# Altium PCB CTA2045v1.PcbDoc
Units mil, origin at the board's own origin, x right, y up, seen from the top; angles counter-clockwise.
Board outline 3700.79 x 1574.8 mil, 2 copper layers (Top Layer, Bottom Layer); 15 components, 25 nets, 90 pads, 185 vias.
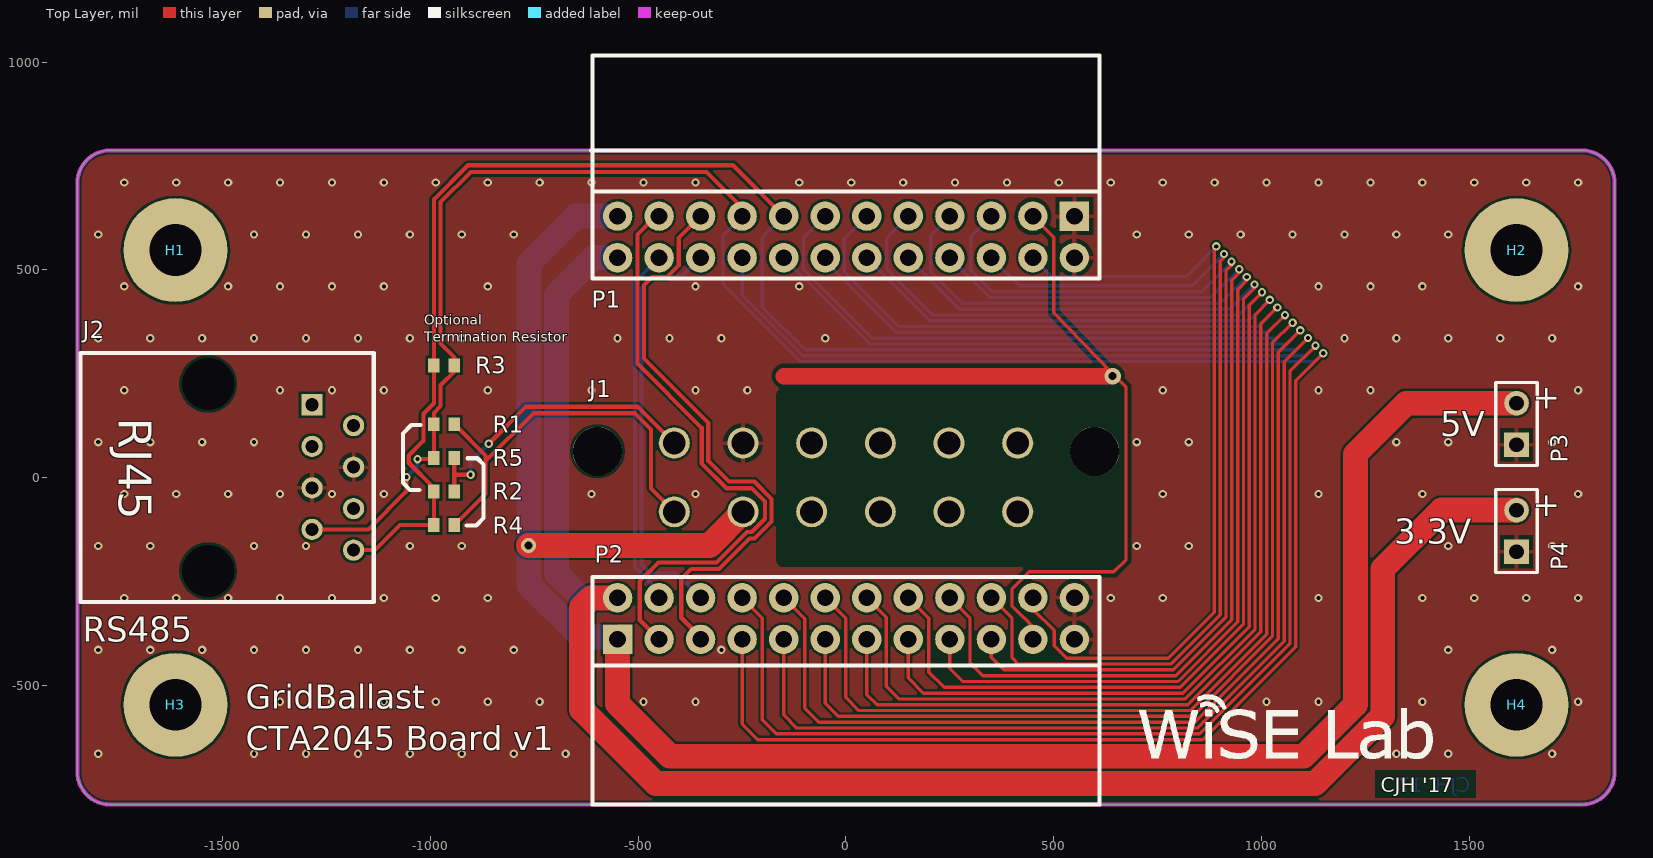
[diagram p0: Top Layer view]
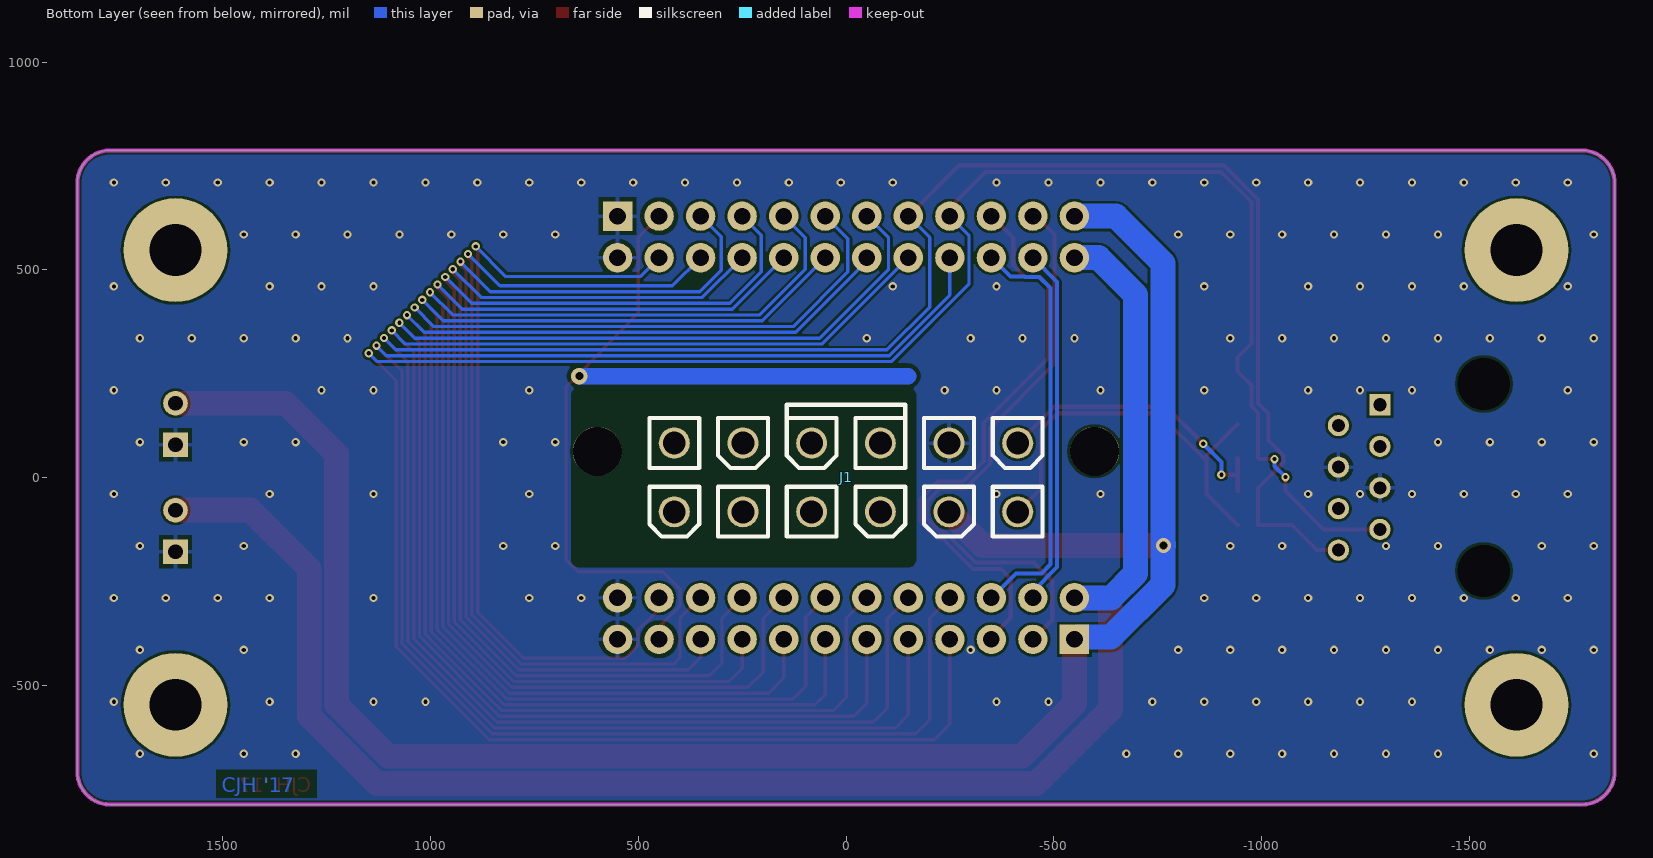
[diagram p1: Bottom Layer view, seen from below]

## Layer stack, top to bottom
Top Solder: solder mask 0.4, Solder Resist, Dk 3.5
Top Layer: signal copper 1.4
Dielectric 1: dielectric 12.6, FR-4, Dk 4.8
Bottom Layer: signal copper 1.4
Bottom Solder: solder mask 0.4, Solder Resist, Dk 3.5

## Board outline
-1771.65,787.4 1771.65,787.4 cw(c1771.65,708.66) 1850.39,708.66 1850.39,-708.66 cw(c1771.65,-708.66) 1771.65,-787.4 -1771.65,-787.4 cw(c-1771.65,-708.66) -1850.39,-708.66 -1850.39,708.66 cw(c-1771.65,708.66)

## Design rules (kind name [scope] priority, off if disabled: settings)
BoardOutlineClearance "BoardOutlineClearance - RJ45" [HasFootprint('RJ45 Unshielded PTH Connector')] p1: gap=0 ignorepadtopadclearanceinfootprint=FALSE
BoardOutlineClearance "BoardOutlineClearance - 4.2mm Pitch" [HasFootprint('2POS 4.2MM PITCH RIGHT ANGLE')] p2: gap=0 ignorepadtopadclearanceinfootprint=FALSE
BoardOutlineClearance "BoardOutlineClearance - Right Angle 0.1inch" [HasFootprint('0.1 INCH 2 ROW 24 POS FEMALE RIGHT-ANGLE HEADER SULLINS') or HasFootprint('0.1 inch 2 row 24 pos male right-angle header Sullins')] p3: gap=0 ignorepadtopadclearanceinfootprint=FALSE
BoardOutlineClearance "BoardOutlineClearance - MicroUSB" [HasFootprint('MicroUSB_TypeB')] p4: gap=0 ignorepadtopadclearanceinfootprint=FALSE
BoardOutlineClearance "BoardOutlineClearance - ESP32" [HasFootprint('ESP-WROOM-32')] p5: gap=0 ignorepadtopadclearanceinfootprint=FALSE
BoardOutlineClearance [All] p6: gap=10 ignorepadtopadclearanceinfootprint=FALSE
Clearance "Clearance - 60HzAnt" [InNet('60HzAnt')] p1: gap=10 ignorepadtopadclearanceinfootprint=FALSE
Clearance "Clearance - Keepout Ignore" [All vs IsKeepOut] p2: gap=0 ignorepadtopadclearanceinfootprint=FALSE
Clearance "Clearance - Antenna" [InNetClass('RF50')] p3: gap=12 ignorepadtopadclearanceinfootprint=FALSE
Clearance [All] p4: gap=6 ignorepadtopadclearanceinfootprint=FALSE
ComponentClearance "Ignore Enclosure Part" [InComponent('H1')] p1: gap=0 collisioncheckmode=3 verticalgap=0 showdistances=FALSE
DiffPairsRouting [All] p1: maxlimit=10 minlimit=6 mostfreqgap=10 toplayer_minwidth=6 toplayer_maxwidth=15 toplayer_prefwidth=10 bottomlayer_minwidth=6 bottomlayer_maxwidth=15 bottomlayer_prefwidth=10 maxuncoupledlength=500
HoleSize [All] p1: absolutevalues=TRUE maxlimit=500 minlimit=8 maxpercent=80.000 minpercent=20.000
MinimumSolderMaskSliver "MinimumSolderMaskSliver - Jumpers3" [HasFootprint('PAD-JUMPER-3-2OF3_NC_BY_TRACE_YES_SILK_FULL_BOX') vs HasFootprint('PAD-JUMPER-3-2OF3_NC_BY_TRACE_YES_SILK_FULL_BOX')] p1: minsoldermaskwidth=0
MinimumSolderMaskSliver "MinimumSolderMaskSliver - Jumpers2" [HasFootprint('PAD-JUMPER-2-NO_NO_SILK') vs HasFootprint('PAD-JUMPER-2-NO_NO_SILK')] p2: minsoldermaskwidth=0
MinimumSolderMaskSliver "MinimumSolderMaskSliver - Jumpers1" [HasFootprint('PAD-JUMPER-2-NC_BY_TRACE_NO_SILK') vs HasFootprint('PAD-JUMPER-2-NC_BY_TRACE_NO_SILK')] p3: minsoldermaskwidth=0
MinimumSolderMaskSliver "MinimumSolderMaskSliver - FTDI" [HasFootprint('PQFN5X5-32_V_FTDI_BIG_VIAS_LEADS') vs HasFootprint('PQFN5X5-32_V_FTDI_BIG_VIAS_LEADS')] p4: minsoldermaskwidth=0
MinimumSolderMaskSliver [All] p5: minsoldermaskwidth=4
NetAntennae [Not InNet('60HzAnt')] p1: netantennaetolerance=0
PolygonConnect "PolygonConnect - ViaStitching" [IsStitchingVia] p1: connectstyle=Direct reliefconductorwidth=10 reliefentries=4 polygonreliefangle="90 Angle" airgapwidth=10
PolygonConnect [All] p2: connectstyle=Relief reliefconductorwidth=10 reliefentries=4 polygonreliefangle="90 Angle" airgapwidth=10
RoomDefinition Main [InComponentClass('Main')] p1: confinementstyle=ConfineIn formatcopy=TRUE lockcomponents=FALSE outline -1860,-805 1755,-805 1755,1035 -1860,1035
RoutingVias [All] p1: holewidth=10 width=20 viastyle="Through Hole" minholewidth=8 minwidth=16 maxholewidth=50 maxwidth=100
ShortCircuit "ShortCircuit - FTDI" [HasFootprint('PQFN5X5-32_V_FTDI_BIG_VIAS_LEADS') and IsPad vs HasFootprint('PQFN5X5-32_V_FTDI_BIG_VIAS_LEADS') and (IsPolygon or IsRegion)] p1: allowed=TRUE
ShortCircuit ExemptJumpers [HasFootprint('PAD-JUMPER-2-NC_BY_TRACE_NO_SILK') or HasFootprint('PAD-JUMPER-3-2OF3_NC_BY_TRACE_YES_SILK_FULL_BOX')] p2: allowed=TRUE
ShortCircuit [All] p3: allowed=FALSE
SilkToSilkClearance [All] p1: silktosilkclearance=5
SilkToSolderMaskClearance [IsPad] p1: minsilkscreentomaskgap=0 clearancetoexposedcopper=TRUE
SolderMaskExpansion [All] p1: expansion=2
Width "Width - Antenna" [InNetClass('RF50')] p1: maxlimit=10000 minlimit=6 preferedwidth=10 impedancedriven=TRUE minimp=50.000000 maximp=50.000000 favimp=50.000000
Width [All] p2: maxlimit=10000 minlimit=6 preferedwidth=10 minimp=50.000000 maximp=50.000000 favimp=50.000000
22 further rules are at their usual default settings.

## Components (designator, comment, footprint, x,y, rotation, side; value= is the part's Value field where it differs from the comment)
H1 "1/8in Hole by 1/4in Ring Fastener" "1/8in Fastener Hole" -1614.17,547.24 r0 top locked
H2 "1/8in Hole by 1/4in Ring Fastener" "1/8in Fastener Hole" 1614.17,547.24 r0 top locked
H3 "1/8in Hole by 1/4in Ring Fastener" "1/8in Fastener Hole" -1614.17,-547.24 r0 top locked
H4 "1/8in Hole by 1/4in Ring Fastener" "1/8in Fastener Hole" 1614.17,-547.24 r0 top locked
J1 "TE 1-1586586-2" "12POS 4.2mm Pitch Vertical" 0,0 r0 bottom locked
J2 "RS485" "RJ45 Unshielded PTH Connector" -1535.43,0 r270 top locked
P1 "0.1\" Pitch, 2 Row, 24 Pos, Male Right-Angle" "0.1 inch 2 row 24 pos male right-angle header Sullins" 0,579.13 r180 top locked
P2 "0.1\" Pitch, 2 Row, 24 Pos, Female, Right-Angle" "0.1 inch 2 row 24 pos female right-angle header Sullins" 0,-339.76 r0 top locked
P3 "5V" HDR1X2 1614.17,78.74 r90 top locked
P4 "3.3V" HDR1X2 1614.17,-178.74 r90 top locked
R1 "0" "RESC1608X06L - RES0603" -967.58,128 r0 top
R2 "0" "RESC1608X06L - RES0603" -967.58,-33.86 r0 top
R3 "120" "RESC1608X06L - RES0603" -967.58,270 r180 top
R4 "0" "RESC1608X06L - RES0603" -967.58,-114.79 r0 top
R5 "0" "RESC1608X06L - RES0603" -967.58,47.07 r0 top

## Footprints (in the part's own frame and the unit in brackets; to place one, negate y for a bottom-side part, rotate by r counter-clockwise, add the part's x,y. Pads: shape width x height; smd on the part's side, far side on the other; paste and mask are expansions set on the pad)
"0.1 inch 2 row 24 pos female right-angle header Sullins" [mm] "Sullins 0.1\" Dual row 24 position female right-angle header"
  rect 1.8x1.8 hole 1.02: 1(-13.97,-1.27)
  round 1.8 hole 1.02: 2(-13.97,1.27) 3(-11.43,-1.27) 4(-11.43,1.27) 5(-8.89,-1.27) 6(-8.89,1.27) 7(-6.35,-1.27) 8(-6.35,1.27) 9(-3.81,-1.27) 10(-3.81,1.27) 11(-1.27,-1.27) 12(-1.27,1.27) 13(1.27,-1.27) 14(1.27,1.27) 15(3.81,-1.27) 16(3.81,1.27) 17(6.35,-1.27) 18(6.35,1.27) 19(8.89,-1.27) 20(8.89,1.27) 21(11.43,-1.27) 22(11.43,1.27) 23(13.97,-1.27) 24(13.97,1.27)
  silkscreen extent -15.5,-11.37 15.5,2.54, body extent -15.49,-11.34 15.49,1.5, height 5.08
"0.1 inch 2 row 24 pos male right-angle header Sullins" [mm] "Sullins 0.1\" Dual row 24 position male right-angle header"
  rect 1.8x1.8 hole 1.02: 1(-13.97,-1.27)
  round 1.8 hole 1.02: 2(-13.97,1.27) 3(-11.43,-1.27) 4(-11.43,1.27) 5(-8.89,-1.27) 6(-8.89,1.27) 7(-6.35,-1.27) 8(-6.35,1.27) 9(-3.81,-1.27) 10(-3.81,1.27) 11(-1.27,-1.27) 12(-1.27,1.27) 13(1.27,-1.27) 14(1.27,1.27) 15(3.81,-1.27) 16(3.81,1.27) 17(6.35,-1.27) 18(6.35,1.27) 19(8.89,-1.27) 20(8.89,1.27) 21(11.43,-1.27) 22(11.43,1.27) 23(13.97,-1.27) 24(13.97,1.27)
  silkscreen extent -15.5,-11.1 15.6,2.54, body extent -15.24,-11.12 15.24,1.6, height 5.04
"1/8in Fastener Hole" [mil]
  round 250 hole 125: 1(0,0)
"12POS 4.2mm Pitch Vertical" [mm] "TE Connectivity 1-1586586-2"
  round 3 hole 3 unplated: 0(-15.2,-1.6) 0(15.2,-1.6)
  round 1.9 hole 1.4: 1(-10.5,2.1) 2(-6.3,2.1) 3(-2.1,2.1) 4(2.1,2.1) 5(6.3,2.1) 6(10.5,2.1) 7(-10.5,-2.1) 8(-6.3,-2.1) 9(-2.1,-2.1) 10(2.1,-2.1) 11(6.3,-2.1) 12(10.5,-2.1)
  silkscreen extent -12.02,-4.44 12.02,3.62
HDR1X2 [mm] "Connector; Header; 2 Position"
  rect 1.5x1.5 hole 0.9: 1(0,0)
  round 1.5 hole 0.9: 2(2.54,0)
  silkscreen extent -1.27,-1.27 3.81,1.27
"RESC1608X06L - RES0603" [mm] "Chip Resistor, 2-Leads, Body 1.60x0.80mm, IPC High Density"
  rect 0.7x0.85 smd: 1(-0.625,0) 2(0.625,0)
  body extent -0.87,-0.48 0.87,0.48, height 0.55
"RJ45 Unshielded PTH Connector" [mm] "Amphenol 54601-908WPLF Unshielded RJ45 PTH Connector"
  round 0 hole 3.2 unplated: 0(-5.716,0) 0(5.716,0)
  rect 1.3x1.3 hole 0.8: 1(-4.444,6.35)
  round 1.3 hole 0.8: 2(-3.174,8.89) 3(-1.904,6.35) 4(-0.634,8.89) 5(0.636,6.35) 6(1.906,8.89) 7(3.176,6.35) 8(4.446,8.89)
  silkscreen extent -7.62,-7.8 7.62,10.12, body extent -7.62,-7.8 7.62,10.2, height 11.5

## Part data
H1 H2 H3 H4: library part "1/8in by 1/4in Fastner Hole"
J1: library part "12POS 4.2mm Pitch Vertical", "TE Connectivity 1-1586586-2", Supplier Part Number 1=70041598, Supplier 1=Allied, Supplier 2=Digi-Key, Supplier Part Number 2=1-1586586-2-ND
J2: library part "RJ45 Unshielded PTH Connector", "Amphenol RJ45 Unshielded Through-Hole Connector", Colour=Black, Contact Resistance=30mR, Current Rating=1A, Flammability Rating="UL94 V-0", Insulation Resistance=500MR, Manufacturer="Amphenol FCI", Manufacturer Part Number=54601-908WPLF, Max Operating Temperature=125°C, Min Operating Temperature=-65°C, Package Quantity=200, Supplier Part Number 1=609-5081-ND, Voltage Rating=1kV, ComponentLink1Description=https://datasheet.ciiva.com/9396/c-bmj-0051-9396388.pdf, ComponentLink1URL=https://datasheet.ciiva.com/9396/c-bmj-0051-9396388.pdf, ComponentLink2Description=https://datasheet.ciiva.com/26824/getdatasheetpartid-465238-26824373.pdf, ComponentLink2URL=https://datasheet.ciiva.com/26824/getdatasheetpartid-465238-26824373.pdf, ComponentLink3Description=https://datasheet.ciiva.com/1108/c-bmj-0051-1108424.pdf, ComponentLink3URL=https://datasheet.ciiva.com/1108/c-bmj-0051-1108424.pdf, ComponentLink4Description=https://datasheet.ciiva.com/15058/c-bmj-0051-15058750.pdf, ComponentLink4URL=https://datasheet.ciiva.com/15058/c-bmj-0051-15058750.pdf, ComponentLink5Description=https://datasheet.ciiva.com/16650/c-bmj-0051-16650286.pdf, ComponentLink5URL=https://datasheet.ciiva.com/16650/c-bmj-0051-16650286.pdf, ComponentLink6Description=https://datasheet.ciiva.com/7629/c-bmj-0051-7629183.pdf, ComponentLink6URL=https://datasheet.ciiva.com/7629/c-bmj-0051-7629183.pdf, Connector Type=RJ45, Contact Material=Bronze,Copper, Contact Plating=Nickel,Gold, Depth=18mm, Direction=Down, Gender=Male, Housing Colour=Black, Housing Material=Polyamide, Lead Free="Lead Free", Length=15.24mm, Mount="Through Hole", Number of Contacts=8, Number of Ports=1, Number of Positions=8, Number of Positions Loaded=8, Number of Rows=1, Orientation="Right Angle", Packaging=Rail/Tube, Pitch=2.54mm, Pricing 2="1=0.51, 10=0.377, 50=0.377, 100=0.362, 1000=0.26, 10000=0.212 (USD)", Radiation Hardening=No, REACH SVHC="No SVHC", Shielding=Unshielded, Stock 2=0, Supplier 1=Digi-Key, Supplier 2=Mouser, Supplier Part Number 2=649-54601-908WPLF, Termination="Through Hole"
P1: library part "0.1\" 2 row 24 position male right-angle header sullins", "Sullins 0.1\" 2 row 24 position male right-angle header", Supplier Part Number 1=S2112EC-12-ND, Gender=Male, Pitch=2.54mm, Positions=24, Rows=2, Supplier 1=Digi-Key
P2: library part "0.1\" 2 row 24 position female right-angle header sullins", "Sullins 0.1\" 2 row 24 position female right-angle header", Supplier Part Number 1=S5526-ND, Pitch=2.54mm, Positions=24, Rows=2, Supplier 1=Digi-Key, Supplier 2=Digi-Key, Supplier Part Number 2=S5565-ND
P3 P4: library part "Header 2", "Header, 2-Pin", LatestRevisionDate=17-Jul-2002, LatestRevisionNote="Re-released for DXP Platform.", Publisher="Altium Limited"
R1 R2 R4 R5: library part "RES0603 0 Jumper 1/10W", "SMT 0603 Ceramic Resistor", Power=1/10W, Supplier Part Number 1=311-0.0GRCT-ND, Tolerance=Jumper, Supplier 1=Digi-Key, Supplier 2=Digi-Key, Supplier Part Number 2=P0.0GCT-ND
R3: library part "RES0603 120 1% 1/10W", "SMT 0603 Ceramic Resistor", Supplier Part Number 1=311-120HRCT-ND, Supplier 1=Digi-Key, Supplier 2=Digi-Key, Supplier 3=Digi-Key, Supplier Part Number 2=RMCF0603FT120RCT-ND, Supplier Part Number 3=YAG3563CT-ND

## Via types
v1: diameter 20, hole 10, Top Layer to Bottom Layer, tented both sides, 183 vias
v2: diameter 36, hole 20, Top Layer to Bottom Layer, tented both sides, 1 vias
v3: diameter 40, hole 20, Top Layer to Bottom Layer, 1 vias

## Nets (pads, with @x,y where several pads share a name; then routed paths per layer and width w, separated by ;. In a path a pad name is that pad's centre, name@x,y a point inside that pad or via, vN(x,y) a via of type N, cw(c..) or ccw(c..) an arc to the next point about the centre after c; other vN are vias at no path point)
3.3V: P1.24 P2.2 P4.2 | length 4173
  Top Layer w60: P2.2 -613.57,-289.76 -636.52,-312.71 -636.52,-558.2 -457.52,-737.2 1129.23,-737.2 1292.08,-574.35 1292.08,-219.94 1433.28,-78.74 P4.2
  Bottom Layer w60: P2.2 -638.57,-289.76 -696.97,-231.36 -696.97,439.75 -607.59,529.13 P1.24
5V: J1.2 P1.23 P2.1 P3.2 | length 4927.9
  Top Layer w60: v2(-764.12,-163.57) -328.92,-163.57 J1.2 ; P2.1 -550,-544.58 -423.39,-671.2 1101.89,-671.2 1226.08,-547.01 1226.08,55.94 1348.88,178.74 P3.2
  Bottom Layer w60: v2(-764.12,-163.57) v2@-764.12,-159.52 ; v2@-762.97,-163.57 -762.97,-258.7 -637.37,-384.31 -555.46,-384.31 P2.1 ; v2@-762.97,-159.52 -762.97,515.69 -649.53,629.13 P1.23
60HzAnt: P1.3 P2.21 | length 1380.6
  Top Layer w8: P2.21 450,-359.15 430.04,-339.2 429.52,-339.2 399.59,-309.27 399.59,-268.83 441.29,-227.14 644.57,-227.14 674.14,-197.57 674.14,217.01 v3@647.05,244.09 ; P1.3 500.39,578.75 500.39,396.77 638.6,252.89 644.5,246.75 v3@647.05,244.09 ; 548.63,237.65 548.91,237.93 ; v3(641.73,244.09) v3@647.05,244.09 ; v3@654.62,236.22 648.43,242.66 v3@647.05,244.09
CT_N: P1.19 P2.5 | length 1414.8
  Top Layer w10: P2.5 -350,-384.28 -396.64,-337.64 -396.64,-244.51 -372.7,-220.57 -305.31,-220.57 -231.87,-147.13 -220.27,-147.13 -179.19,-106.05 -179.19,-51.62 -220.96,-9.85 -281.69,-9.85 -331.44,39.9 -331.44,131.27 -486.2,286.03 -486.2,463.22 -466.72,482.7 -430.77,482.7 -402.79,510.68 -402.79,576.35 P1.19
CT_P: P1.21 P2.3 | length 1440.8
  Top Layer w10: P2.3 -496.43,-343.33 -496.43,-249.14 -451.86,-204.57 -311.94,-204.57 -238.5,-131.13 -226.89,-131.13 -195.19,-99.43 -195.19,-58.24 -227.58,-25.85 -288.32,-25.85 -347.44,33.27 -347.44,119.51 -502.2,274.27 -502.2,585.06 -458.12,629.13 P1.21
GND: J1.8 J2.4 J2.5 P1.1 P1.2 P2.23 P2.24 P3.1 P4.1
  other v1: -1800,-665 -1425,-665 -1300,-665 -1175,-665 -1050,-665 -925,-665 -800,-665 -675,-665 1325,-665 1450,-665 1700,-665 -1362.5,-540 -1237.5,-540 -1112.5,-540 -987.5,-540 -862.5,-540 -737.5,-540 -487.5,-540 -362.5,-540 1012.5,-540 1137.5,-540 1387.5,-540 1762.5,-540 -1800,-415 -1675,-415 -1550,-415 -1425,-415 -1300,-415 -1175,-415 -1050,-415 -925,-415 -800,-415 -300,-415 1450,-415 1700,-415 -1737.5,-290 -1612.5,-290 -1487.5,-290 -1362.5,-290 -1237.5,-290 -1112.5,-290 -987.5,-290 -862.5,-290 637.5,-290 762.5,-290 1137.5,-290 1387.5,-290 1512.5,-290 1637.5,-290 1762.5,-290 -1800,-165 -1675,-165 -1425,-165 -1300,-165 -1050,-165 -925,-165 700,-165 825,-165 1450,-165 1700,-165 -1737.5,-40 -1612.5,-40 -1487.5,-40 -1362.5,-40 -1237.5,-40 -1112.5,-40 -612.5,-40 -362.5,-40 762.5,-40 1137.5,-40 1387.5,-40 1762.5,-40 -1800,85 -1675,85 -1550,85 -1425,85 700,85 825,85 1325,85 1450,85 1700,85 -1737.5,210 -1362.5,210 -1237.5,210 -1112.5,210 -862.5,210 -612.5,210 -362.5,210 -237.5,210 762.5,210 1137.5,210 1262.5,210 1762.5,210 -1800,335 -1675,335 -1550,335 -1425,335 -1300,335 -1175,335 -1050,335 -925,335 -550,335 -425,335 -300,335 -50,335 1200,335 1325,335 1450,335 1575,335 1700,335 -1737.5,460 -1487.5,460 -1362.5,460 -1237.5,460 -1112.5,460 -862.5,460 -362.5,460 -112.5,460 1137.5,460 1262.5,460 1387.5,460 1762.5,460 -1800,585 -1425,585 -1300,585 -1175,585 -1050,585 -925,585 -800,585 700,585 825,585 950,585 1075,585 1200,585 1325,585 1450,585 -1737.5,710 -1612.5,710 -1487.5,710 -1362.5,710 -1237.5,710 -1112.5,710 -987.5,710 -862.5,710 -737.5,710 -612.5,710 -487.5,710 -362.5,710 -112.5,710 12.5,710 137.5,710 262.5,710 387.5,710 512.5,710 637.5,710 762.5,710 887.5,710 1012.5,710 1137.5,710 1262.5,710 1387.5,710 1512.5,710 1637.5,710 1762.5,710
GPIO1: P1.18 P2.8 | length 3971.6
  Top Layer w8: P2.8 -201.31,-338.46 -201.31,-583.69 -167.8,-617.2 851.62,-617.2 1068.73,-400.08 1068.73,255.62 v1(1130.38,317.27)
  Bottom Layer w8: P1.18 -250,439.13 -104.14,293.26 1106.38,293.26 v1(1130.38,317.27)
GPIO2: P1.16 P2.10 | length 3631.3
  Top Layer w8: P2.10 -99.26,-340.5 -99.26,-555.09 -65.15,-589.2 840.02,-589.2 1040.73,-388.48 1040.73,301.16 v1(1093.61,354.04)
  Bottom Layer w8: P1.16 57.87,321.26 1060.84,321.26 v1(1093.61,354.04)
GPIO3: P1.14 P2.12 | length 3352.6
  Top Layer w8: P2.12 -0.9,-338.86 -0.9,-529.12 31.18,-561.2 828.42,-561.2 1012.73,-376.88 1012.73,346.7 v1(1056.85,390.8)
  Bottom Layer w8: P1.14 -50,520.31 121.05,349.26 1015.3,349.26 v1(1056.85,390.8)
GPIO4: P1.12 P2.14 | length 3063.8
  Top Layer w8: P2.14 97.13,-336.89 97.13,-503.02 127.3,-533.2 816.82,-533.2 984.73,-365.29 984.73,392.23 v1(1020.08,427.57)
  Bottom Layer w8: P1.12 201.87,377.26 969.77,377.26 v1(1020.08,427.57)
GPIO5: P1.10 P2.16 | length 2772.6
  Top Layer w8: P2.16 199.43,-339.19 199.43,-468.56 236.06,-505.2 805.23,-505.2 956.73,-353.69 956.73,429.29 983.31,455.86 v1(983.31,464.34)
  Bottom Layer w8: P1.10 273.87,405.26 924.23,405.26 v1(983.31,464.34)
GPIO6: P1.8 P2.18 | length 2490.3
  Top Layer w8: P2.18 298.5,-338.26 298.5,-445.95 329.75,-477.2 793.63,-477.2 928.73,-342.09 928.73,474.83 946.54,492.63 v1(946.54,501.11)
  Bottom Layer w8: P1.8 345.87,433.26 878.69,433.26 v1(946.54,501.11)
GPIO7: P1.6 P2.20 | length 2213.4
  Top Layer w8: P2.20 399.72,-339.49 399.72,-434.59 414.32,-449.2 782.03,-449.2 900.73,-330.49 900.73,520.37 909.77,529.4 v1(909.77,537.88)
  Bottom Layer w8: P1.6 417.87,461.26 833.15,461.26 v1(909.77,537.88)
GPIO8: P1.4 P2.22 | length 1953.5
  Top Layer w8: P2.22 450,-316.99 501.25,-368.24 501.25,-405.27 531.18,-435.2 776.23,-435.2 886.73,-324.69 886.73,551.62 v1(891.38,556.27)
  Bottom Layer w8: P1.4 495.43,483.7 818.81,483.7 v1(891.38,556.27)
I2C_SCL: P1.20 P2.6 | length 1013.1
  Bottom Layer w10: P2.6 -408.85,-230.91 -470.36,-230.91 -492.24,-209.03 -492.24,455.76 -465.3,482.7 -430.77,482.7 -429.97,483.5 -395.64,483.5 P1.20
I2C_SDA: P1.22 P2.4 | length 867.1
  Bottom Layer w10: P2.4 -450,-274.16 -508.24,-215.92 -508.24,470.89 P1.22
Leak_N: P1.11 P2.13 | length 3234.9
  Top Layer w8: P2.13 50,-522.55 74.65,-547.2 822.62,-547.2 998.73,-371.08 998.73,369.46 v1(1038.46,409.19)
  Bottom Layer w8: P1.11 -4.57,574.57 -4.57,494.68 126.85,363.26 992.53,363.26 v1(1038.46,409.19)
Leak_P: P1.13 P2.11 | length 3510
  Top Layer w8: P2.11 -50,-543.56 -18.37,-575.2 834.22,-575.2 1026.73,-382.68 1026.73,323.93 v1(1075.23,372.42)
  Bottom Layer w8: P1.13 -102.51,576.62 -102.51,501.45 63.67,335.26 1038.07,335.26 v1(1075.23,372.42)
Mic_In: P1.9 P2.15 | length 2934.7
  Top Layer w8: P2.15 150,-482.67 186.53,-519.2 811.02,-519.2 970.73,-359.49 970.73,415 v1(1001.69,445.96)
  Bottom Layer w8: P1.9 97.96,577.1 97.96,500.97 207.67,391.26 947,391.26 v1(1001.69,445.96)
RFU1: P1.7 P2.17 | length 2646.7
  Top Layer w8: P2.17 250,-459.91 281.29,-491.2 799.43,-491.2 942.73,-347.89 942.73,452.06 964.92,474.24 v1(964.92,482.73)
  Bottom Layer w8: P1.7 204.15,583.28 204.15,494.79 279.67,419.26 901.46,419.26 v1(964.92,482.73)
RFU2: P1.5 P2.19 | length 2364.6
  Top Layer w8: P2.19 350,-432.84 380.36,-463.2 787.83,-463.2 914.73,-336.29 914.73,497.6 928.15,511.01 v1(928.15,519.5)
  Bottom Layer w8: P1.5 300.05,579.19 300.05,498.88 351.67,447.26 855.92,447.26 v1(928.15,519.5)
RS485_1: J1.1 R1.2 R4.2 | length 988.6
  Top Layer w10: R4.2 -867.64,-39.47 -867.64,39.23 ; R1.2 -867.64,52.67 -867.64,39.23 ; J1.1 -469.58,-26.49 -469.58,115.66 -508.32,154.41 -752.47,154.41 -867.64,39.23
RS485_2: J1.7 R2.2 R5.2 | length 732.8
  Top Layer w10: R2.2 -942.97,6.6 ; R5.2 -942.97,6.6 ; v1(-903.68,6.6) -942.97,6.6 ; v1(-859.98,81.22) -770.8,170.41 -501.69,170.41 -413.96,82.68 J1.7
  Bottom Layer w10: v1(-903.68,6.6) -903.68,37.52 v1(-859.98,81.22)
RS4855_A: J2.8 P1.15 P2.9 R2.1 R3.2 R4.1 | length 5827.2
  Top Layer w8: P2.9 -150,-571.77 -118.57,-603.2 845.82,-603.2 1054.73,-394.28 1054.73,278.39 v1(1112,335.65)
  Top Layer w10: J2.8 -1133.94,-175.04 -1073.69,-114.79 R4.1 R2.1 -992.18,-25 -1052.63,35.45 -1052.63,52.84 -1016.95,88.52 -1016.95,106.71 -1016.96,153.41 -991.82,178.56 -991.82,669.6 -909.85,751.57 -272.44,751.57 P1.15
  Bottom Layer w8: P1.15 -201.41,577.72 -201.41,410.34 -98.34,307.26 1083.61,307.26 v1(1112,335.65)
RS4855_B: J2.7 P1.17 P2.7 R1.1 R3.1 R5.1 | length 5950.7
  Top Layer w8: P2.7 -250,-593.66 -212.47,-631.2 858.89,-631.2 1082.73,-407.36 1082.73,232.85 v1(1148.77,298.88)
  Top Layer w10: J2.7 -1149.91,-125.04 -1057.93,-33.07 v1(-1057.93,0.71) ; v1(-1031.63,44.15) -995.11,44.15 R5.1 R1.1 -992.18,155.56 -975.82,171.93 -975.82,221.99 -942.22,255.58 -942.22,288.53 -975.82,322.13 -975.82,662.98 -903.22,735.57 -335.92,735.57 -250,649.66 P1.17 ; P2.7 P2.7@-250,-387.16
  Bottom Layer w8: P1.17 -295.95,583.19 -295.95,465.28 -109.94,279.26 1129.15,279.26 v1(1148.77,298.88)
  Bottom Layer w10: v1(-1057.93,0.71) -1031.63,27.02 v1(-1031.63,44.15)
pads on no net: H1.1 H2.1 H3.1 H4.1 J1.0 J1.3 J1.4 J1.5 J1.6 J1.9 J1.10 J1.11 J1.12 J2.0 J2.1 J2.2 J2.3 J2.6

## Polygon pours and split planes (outlines as drawn)
GND on Bottom Layer "Bottom Layer-GND" (solid, pour order 1): -1771.65,787.4 1771.65,787.4 cw(c1771.65,708.66) 1850.39,708.66 1850.39,-708.66 cw(c1771.65,-708.66) 1771.65,-787.4 -1771.65,-787.4 cw(c-1771.65,-708.66) -1850.39,-708.66 -1850.39,708.66 cw(c-1771.65,708.66)
GND on Top Layer "Top Layer-GND" (solid, pour order 0): -1771.65,787.4 1771.65,787.4 cw(c1771.65,708.66) 1850.39,708.66 1850.39,-708.66 cw(c1771.65,-708.66) 1771.65,-787.4 -1771.65,-787.4 cw(c-1771.65,-708.66) -1850.39,-708.66 -1850.39,708.66 cw(c-1771.65,708.66)

## Keep-outs
Keep-Out Layer:
  the board outline again, w10

## Other copper
Top Layer:
  text "CJH '17" at 1287.23,-758.2 h35
Bottom Layer:
  text "CJH '17" at 1502.84,-757.96 h35
Multi-Layer:
  pour cut-out: -149.21,216.54 641.73,216.54 cw(c641.73,196.85) 661.42,196.85 661.42,-196.85 cw(c641.73,-196.85) 641.73,-216.54 -149.21,-216.54 cw(c-149.21,-196.86) -168.89,-196.86 -168.89,196.86 cw(c-149.21,196.86)
  lines w40 net 60HzAnt: -149.21,244.09 641.65,244.09

## Silkscreen, mask and mechanical layers (free items; w line width, h text height)
Top Overlay:
  drawing of 1299 lines, arcs and shapes, not listed
  text "Optional / Termination Resistor" at -1015.04,318.85 h40
  text "+" at 1730,157.11 h100 r90
  text "+" at 1730,-101.4 h100 r90
  text "GridBallast / CTA2045 Board v1" at -1445.36,-675.59 h100
  text "CJH '17" at 1287.23,-758.2 h35

## Dimensions
1850.39,-708.66 to -1850.39,-708.66 on Mechanical 1
-1771.65,787.4 to -1771.65,-787.4 on Mechanical 1

## Text inside footprints (layer, text, board x,y; h text height)
J1: Mechanical 1 "Conn. Mounts Upward" at -545,260 h60 r180
J2: Top Overlay "RJ45" at -1751.05,143.72 h78.74 r270
P1: Mechanical 1 "5.29MM / FROM / CENTER" at -88,964.87 h39.37 r270
P2: Mechanical 1 "11.37MM / FROM / CENTER" at 88,-725.5 h39.37 r90